# EAGLE board untitled (EAGLE 6.4)
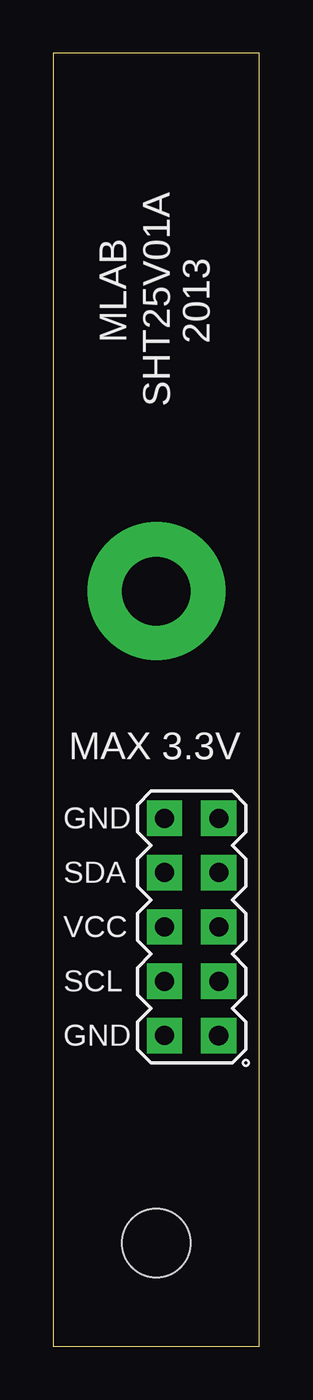
[diagram p0: board, top side]
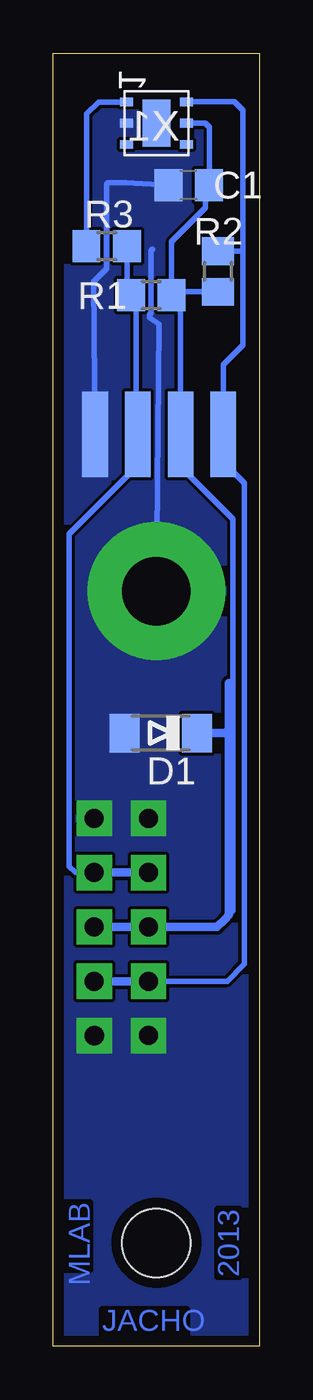
[diagram p1: board, bottom side, seen from below]

Size 9.65 x 60.45 mm. Coordinates in mm from the lower left corner, seen from the top.
Outline: 0,0 9.65,0 9.65,60.45 0,60.45 0,0
Copper layers (1*16): Top 0.035mm / dielectric 1.5mm / Bottom 0.035mm
Design rules "jacho": minimum track width 8mil, minimum drill 16mil, track to track 6mil, track to pad 6mil, pad to pad 6mil, via to via 6mil, smd to smd 6mil, copper to edge 20mil, drill to drill 8mil, minimum pad ring 10mil, minimum via ring 8mil, stop-mask expansion 4mil, vias tented up to drill 25mil, thermal gap 0mil
Holes 3.2 mm at 4.83,4.83

## Footprints (pad centres in the part's own frame; a part is rotated, then mirrored left to right if it is on the bottom)
C0805 = smd 1.3 x 1.5: 1 -0.95,0; 2 0.95,0
MINIMELF = smd 1.4 x 1.8: A 1.7,0; C -1.7,0
R0805 = smd 1.3 x 1.5: 1 -0.95,0; 2 0.95,0
MA05-2 = drill 0.914 pad 1.651 square: 1 -5.08,-1.27 | drill 0.889 pad 1.651 square: 2 -5.08,1.27; 3 -2.54,-1.27; 4 -2.54,1.27; 5 0,-1.27; 6 0,1.27; 7 2.54,-1.27; 8 2.54,1.27; 9 5.08,-1.27; 10 5.08,1.27
SMD_MA04-1 = smd 4 x 1.2: 1 0,3; 2 0,1; 3 0,-1; 4 0,-3
SHT25 = smd 0.4 x 0.6: 1 1,1.4; 2 0,1.4; 3 -1,1.4; 4 -1,-1.4; 5 0,-1.4; 6 1,-1.4 | smd 2.2 x 1.3: 7 0,0
SROUB3M = drill 3.2 pad 6.452: P$1 0,0

## Placement (x,y rotation side)
C1  100nF  [C0805]  3.32,54.29 180 bottom
D1  BZV55C-3,6V  [MINIMELF]  4.62,28.67 180 bottom
R1  10k  [R0805]  5.07,49.15 0 bottom
R2  10k  [R0805]  1.95,50.25 270 bottom
R3  0R  [R0805]  7.15,51.44 180 bottom
SV1  [MA05-2]  6.47,19.6 90 top
SV2  [SMD_MA04-1]  4.7,42.65 270 bottom
X1  SHT25  [SHT25]  4.83,57.19 90 bottom
X2  SROUB3M  [SROUB3M]  4.83,35.31 0 top

## Library data of the parts
C1 R1-R3 = rcl
D1 = moje_diody
SV1 = moje_hrebinky; OC_FARNELL: unknown; OC_NEWARK: unknown
SV2 = moje_hrebinky
X1 = moje_cidla
X2 = moje

## Nets
GND: C1.2 D1.A SV1.1 SV1.2 SV1.9 SV1.10 SV2.4 X1.2 X2.P$1
N$2: R3.2 X1.1
SCL: R2.1 SV1.3 SV1.4 SV2.1 X1.6
SDA: R1.1 R3.1 SV1.7 SV1.8 SV2.3
VCC: C1.1 D1.C R1.2 R2.2 SV1.5 SV1.6 SV2.2 X1.5

## Tracks (layer width: path | path; a pad name or v marks a point on that pad's centre or on a via)
GND
  Bottom 0.254: SV2.4 7.76,49.78 7.16,50.38 7.16,54.35 7.09,54.41 6.28,54.41 C1.2 | X2.P$1 4.7,47.79 5.14,48.11 5.14,48.24 5.08,48.3 5.08,51.23 5.01,51.29
  pour Bottom: -0.32,61.47 9.84,61.47 9.91,-0.25 -0.25,-0.25
N$2
  Bottom 0.254: R3.2 8.1,57.62 7.55,58.18 6.24,58.18 X1.1
SCL
  Bottom 0.254: SV1.4 1.51,17.06 0.71,17.86 0.71,40.36 1.63,41.28 1.63,42.58 SV2.1 1.7,45.9 0.79,46.81 0.79,51.23 | X1.6 1.19,58.19 0.79,57.79 0.79,51.23 | R2.1 0.81,51.2 0.79,51.23
  Bottom 0.406: SV1.3 SV1.4
SDA
  Bottom 0.254: 5.79,49.08 5.79,49.34 5.86,49.41 | R3.1 6.2,49.33 R1.1 5.86,49.15 5.79,49.08 | SV1.8 8.62,22.14 8.91,22.43 8.91,37.97 5.66,41.22 5.66,42.13 | 5.66,42.13 5.66,42.39 5.66,42.61 SV2.3 | 5.79,49.08 5.79,42.26 5.66,42.13
  Bottom 0.406: SV1.7 SV1.8
VCC
  Bottom 0.254: R2.2 3.97,49.3 R1.2 | R1.2 4.12,51.66 2.54,53.24 2.54,53.96 2.37,54.13 | 2.37,54.13 2.22,54.28 | X1.5 2.53,57.19 2.35,57.01 2.35,54.35 2.37,54.33 C1.1 2.37,54.13 | 3.7,48.72 3.7,48.63 3.71,48.64 3.71,48.69 | 3.7,48.72 R1.2 | 1.24,28.61 1.44,28.41 | 1.63,19.96 1.24,20.35 1.24,38.68 3.91,41.35 3.91,42.44 SV2.2 3.7,48.72 | 3.7,48.72 R1.2
  Bottom 0.406: SV1.5 SV1.6 1.99,19.6 1.63,19.96 1.44,20.16 1.44,28.41 1.44,28.8 | 1.44,28.8 1.44,31.01 | D1.C 1.57,28.67 1.44,28.8

## Text on the board
Bottom: 2013 | MLAB | JACHO
tPlace: MLAB | 2013 | SHT25V01A | MAX 3.3V | GND | SDA | VCC | SCL | GND